# Altium PCB PCB2.PcbDoc
Units mil, origin at the board's own origin, x right, y up, seen from the top; angles counter-clockwise.
Board outline 4795.03 x 3920.03 mil, 2 copper layers (Top Layer, Bottom Layer); 16 components, 23 nets, 85 pads, 0 vias.
Unrouted connection lines stored in the file: 3.
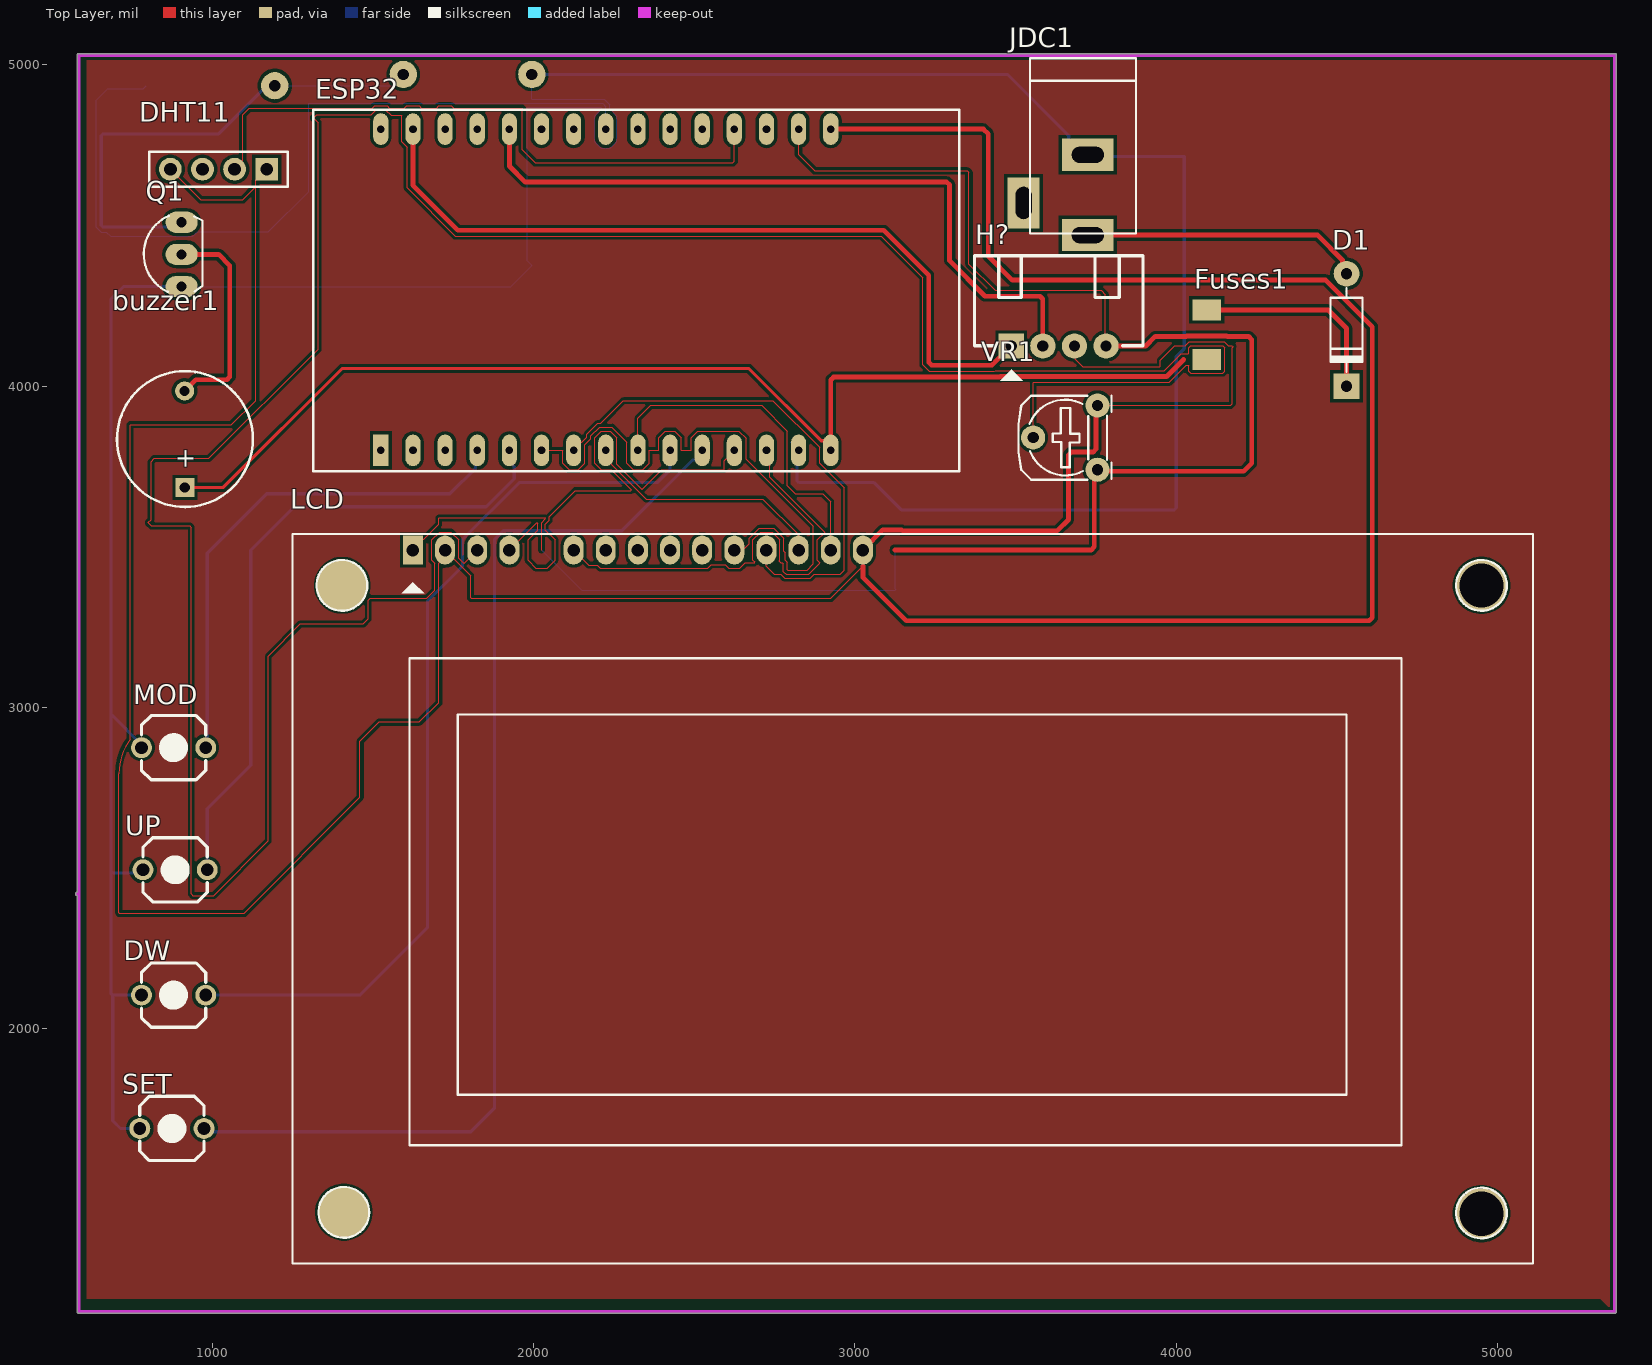
[diagram p0: Top Layer view]
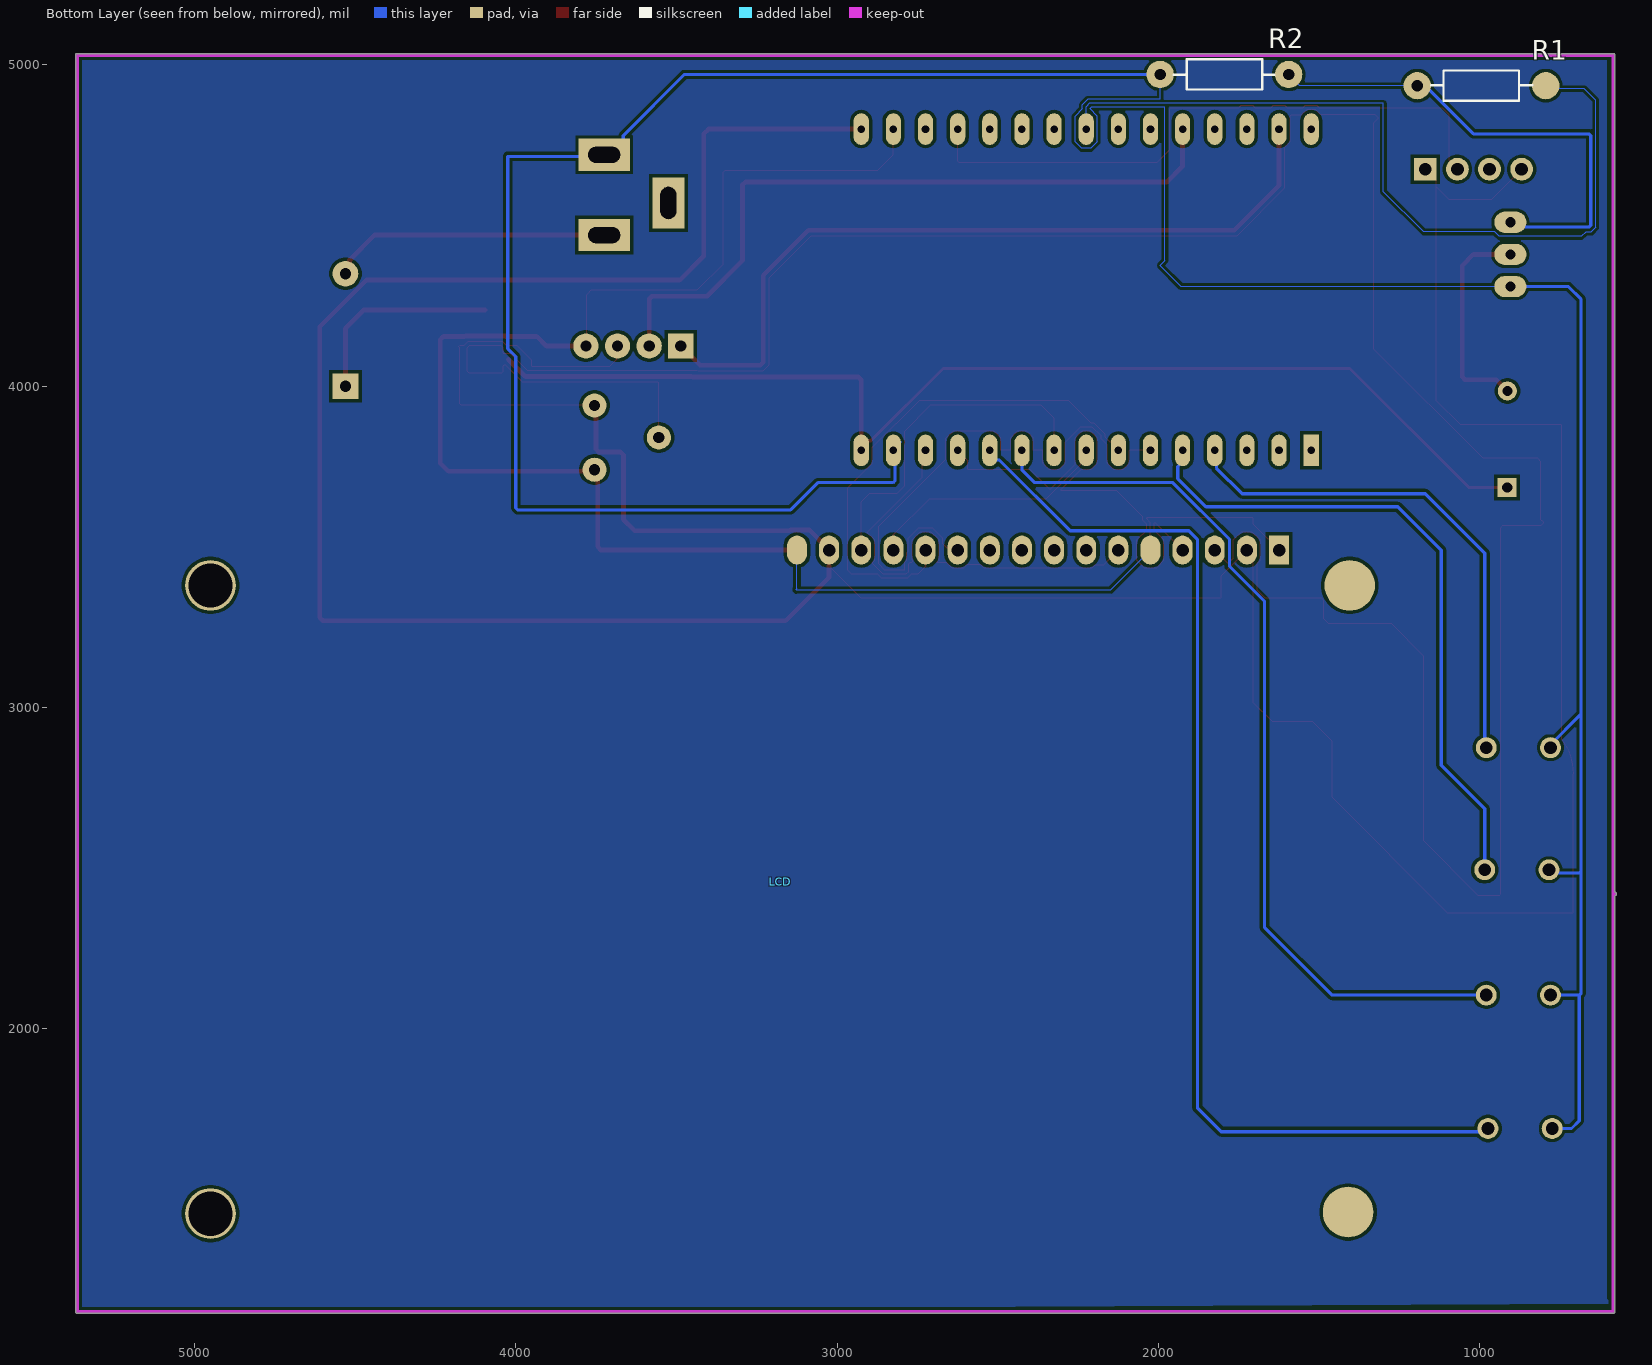
[diagram p1: Bottom Layer view, seen from below]
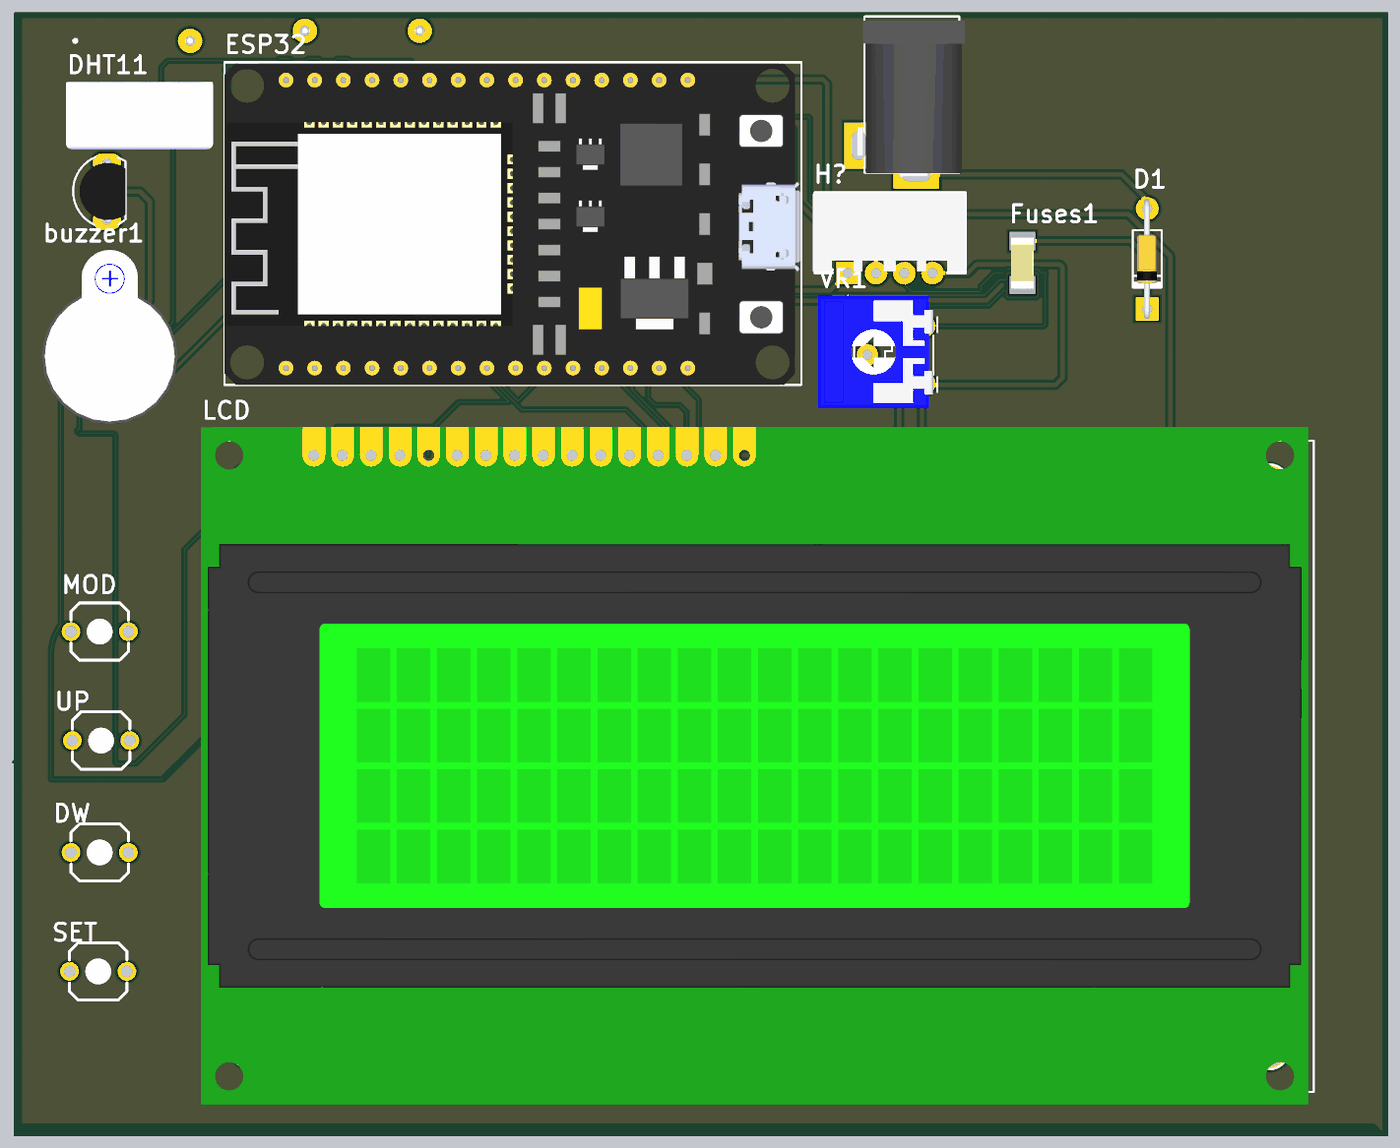
[diagram p2: 3D render of the assembled board from above, using the file's embedded part models]

## Layer stack, top to bottom
Top Solder: solder mask 0.4, Solder Resist, Dk 3.5
Top Layer: signal copper 1.4
Dielectric 1: dielectric 12.6, FR-4, Dk 4.8
Bottom Layer: signal copper 1.4
Bottom Solder: solder mask 0.4, Solder Resist, Dk 3.5

## Board outline
579.99,1120 579.99,2414.99 cw(c580,2420) 579.99,2425.01 579.99,5030 cw(c585,5030) 585,5035.02 5365,5035.02 cw(c5365,5030) 5370.02,5030 5370.02,1120 cw(c5365,1120) 5365,1114.98 585,1114.98 cw(c585,1120)

## Design rules (kind name [scope] priority, off if disabled: settings)
Clearance [All] p1: gap=10 ignorepadtopadclearanceinfootprint=FALSE except(0: Arc-Hole Track-Hole SMDPad-Hole THPad-Hole Via-Hole Fill-Hole Poly-Hole Region-Hole Text-Hole)
PolygonConnect [All] p1: connectstyle=Relief reliefconductorwidth=10 reliefentries=4 polygonreliefangle="90 Angle" airgapwidth=10
RoutingVias [All] p1: holewidth=28 width=50 viastyle="Through Hole" minholewidth=28 minwidth=50 maxholewidth=28 maxwidth=50
SilkToSilkClearance [IsText] p1: silktosilkclearance=10
SolderMaskExpansion [All] p1: expansion=4 istentingtop=FALSE
Width [All] p1: maxlimit=50 minlimit=2 preferedwidth=10
29 further rules are at their usual default settings.

## Classes and differential pairs
component class Sheet1: D1 DHT11 DW Fuses1 JDC1 LCD MOD Q1 R1 R2 SET UP VR1

## Components (designator, comment, footprint, x,y, rotation, side; value= is the part's Value field where it differs from the comment)
buzzer1 "TMB12A05" Speaker 915,3685 r90 top
D1 "1N4007" D1A 4530,4350 r90 top
DHT11 "DHT11" DHT11 1020,4675 r180 top
DW "Nut Nhan 2 Chan SMD 3x6x2.5" "Button 2 Pin" 880,2105 r180 top
ESP32 "ESP32 DEVKIT" "ESP32 WROOM 32 KIT" 1525,3800 r90 top
Fuses1 "0.5A 125V" "Cau Chi SMD1808" 4095,4160 r270 top
H? "Header 4P 2.54 Duc Cong" "Header 4P DC 2.54" 3487.57,4126 r90 top
JDC1 "Jac DC" DC-IN 3625,4595 r270 top
LCD "LCD 2004" "LCD 2004" 1625,3490 r0 top
MOD "Nut Nhan 2 Chan SMD 3x6x2.5" "Button 2 Pin" 880,2875 r180 top
Q1 "C1815" TO92 905,4410 r90 top value=C9014
R1 "1k" RES-1/4W#1 1010,4940 r0 bottom
R2 "10k" RES-1/4W#2 1780,4965 r180 bottom
SET "Nut Nhan 2 Chan SMD 3x6x2.5" "Button 2 Pin" 875,1690 r180 top
UP "Nut Nhan 2 Chan SMD 3x6x2.5" "Button 2 Pin" 885,2495 r180 top
VR1 "10K" VR-S2 3755,3740 r90 top value="Volume 50k"

## Footprints (in the part's own frame and the unit in brackets; to place one, negate y for a bottom-side part, rotate by r counter-clockwise, add the part's x,y. Pads: shape width x height; smd on the part's side, far side on the other; paste and mask are expansions set on the pad)
"Button 2 Pin" [mil] "Button 200mil 2 Pin"
  round 65 hole 40: 1(-100,0) 2(100,0)
  silkscreen extent -100,-100 100,100
"Cau Chi SMD1808" [mil]
  rect 64x90 smd: 1(-77,0) 2(77,0)
  body extent -91,-39 91,39, height 39
D1A [mil] "Diode 1A, W 100mil, L 350mil"
  round 80 hole 35: 1(0,0)
  rect 80x80 hole 35: 2(-350,0)
  silkscreen extent -305,-50 -45,50, body extent -386,-33 34,36, height 84
DC-IN [mil] "Jac DC input"
  rect 100x160 hole 50 slot 100 at 90 deg: 1(125,100) 2(-125,100)
  rect 160x100 hole 50 slot 100 at 0 deg: 3(25,-100)
  silkscreen extent -425,-80 120,250, body extent -410,-105 134,269, height 434
DHT11 [mm]
  rect 1.8x1.8 hole 1.02: 1(-3.81,0)
  round 1.8 hole 1.02: 2(-1.27,0) 3(1.27,0) 4(3.81,0)
  silkscreen extent -5.46,-1.4 5.46,1.4, body extent -6.48,-3 6.52,3, height 26
"ESP32 WROOM 32 KIT" [mm]
  rect 2.5x1.2 hole 0.6: 1(0,0)
  oval 2.5x1.2 hole 0.6: 2(0,-2.54) 3(0,-5.08) 4(0,-7.62) 5(0,-10.16) 6(0,-12.7) 7(0,-15.24) 8(0,-17.78) 9(0,-20.32) 10(0,-22.86) 11(0,-25.4) 12(0,-27.94) 13(0,-30.48) 14(0,-33.02) 15(0,-35.56) 16(25.4,-35.56) 17(25.4,-33.02) 18(25.4,-30.48) 19(25.4,-27.94) 20(25.4,-25.4) 21(25.4,-22.86) 22(25.4,-20.32) 23(25.4,-17.78) 24(25.4,-15.24) 25(25.4,-12.7) 26(25.4,-10.16) 27(25.4,-7.62) 28(25.4,-5.08) 29(25.4,-2.54) 30(25.4,0)
  silkscreen extent -1.65,-45.72 26.92,5.33, body extent -1.65,-45.6 26.85,5.33, height 10.49
"Header 4P DC 2.54" [mil]
  rect 78.74x78.74 hole 35: 1(-1,1)
  round 78.74 hole 35: 2(-1,-97.43) 3(-1,-195.85) 4(-1,-294.28)
  silkscreen extent -110,-409 280,115, body extent 5,-413 278,123, height 290
"LCD 2004" [mil] "LCD dipslay 20x4, 16 pin"
  rect 62x90 hole 39: 1(0,0)
  oval 62x90 hole 39: 2(100,0) 3(200,0) 4(300,0) 6(500,0) 7(600,0) 8(700,0) 9(800,0) 10(900,0) 11(1000,0) 12(1100,0) 13(1200,0) 14(1300,0) 15(1400,0)
  oval 62x90 smd far side: 5(400,0) 16(1500,0)
  round 157.48 all layers, no hole: "Hole 0"(-220,-110) "Hole 3"(-215,-2060)
  round 157.48 hole 137.8: "Hole 0"(3325,-2065) "Hole 0"(3325,-110)
  silkscreen extent -375,-2220 3485,50, body extent -392,-2264 3466,98, height 417
RES-1/4W#1 [mil]
  round 85 smd: 1(-215,5)
  round 85 hole 35: 2(185,5)
  silkscreen extent -173,-42 141,52, body extent -227,-42 197,52, height 95
RES-1/4W#2 [mil]
  round 85 hole 35: 1(-215,5) 2(185,5)
  silkscreen extent -173,-42 141,52, body extent -227,-42 197,52, height 95
Speaker [mm]
  rect 1.5x1.5 hole 0.8: 1(0,0)
  round 1.5 hole 0.8: 2(7.62,0.013)
  silkscreen extent -1.55,-5.38 9.18,5.36, body extent -2.22,-6 13.24,6, height 4.5
TO92 [mil] "TO-92"
  oval 66x100 hole 32: 1(-100,0) 2(0,0) 3(100,0)
  silkscreen extent -117,-65 120,118, body extent -109,-66 109,95, height 245
VR-S2 [mil] "Resistor Variable"
  round 75 hole 35: 1(0,0) 2(100,200) 3(200,0)
  silkscreen extent -31,-44 231,246, body extent -87,-30 307,372, height 165

## Part data
buzzer1: library part Buzz, "Buzzer >= 80dB, 5V"
D1: library part D1A, "Diode 1A"
DHT11: Manufacturer="W¨¹rth Elektronik eiSos GmbH", partNo=613004143121, ComponentLink1 Description=Manufacturer, ComponentLink1URL=http://www.we-online.com, ComponentLink2 Description=Datasheet, ComponentLink2URL=http://katalog.we-online.de/em/datasheet/6130xx143121.pdf, Created by="Karrer Zheng", Created Date="29 March 2013", NoPins=04
ESP32: library part "ESP32 WROOM 32 KIT"
Fuses1: library part "Cau chi 0.5A 125V SMD1808", "Cau chi 0.5A 125V SMD1808", Ma_Hang=MH009241, Ten="Cầu Chì 0.5A 125V SMD1808 0451.500MRL"
H?: "Cắm", Chung_Loai=Cắm, Don_Vi=Con, Ma_Hang=MH001310, Ten_Linh_Kien="Header 4P XH2.54-4P Đực Cong"
JDC1: library part DCIN, "Jac DC input"
LCD: library part "LCD 2004 5V", "LCD 2004 5V Xanh Dương", CHIP=HD44780, Don Vi Mua=Nshop, Ma_Hang=WVEZ, Ten="LCD 2004 Xanh Dương"
Q1: library part "Trans C1815 DIP", "NPN transistor"
R1: library part "Tro 0603 1% 1k", "Dán", Chung_Loai=Dán, Don_Vi=Con, Ma_Hang=MH006334, So_Chan=2, Ten_Linh_Kien="Trở 0603 1% 1k"
R2: library part "Tro 0603 5% 10k", "Dán", Chung_Loai=Dán, Don_Vi=Con, Ma_Hang=MH006316, So_Chan=2, Ten_Linh_Kien="Trở 0603 5% 10k"
VR1: library part VR-S, "Var Resistor"
DW MOD SET UP: Ma_Hang=MH001036, Ten="Nút Nhấn 2 Chân 3x6x2.5MM SMD"

## Nets (pads, with @x,y where several pads share a name; then routed paths per layer and width w, separated by ;. In a path a pad name is that pad's centre, name@x,y a point inside that pad or via, vN(x,y) a via of type N, cw(c..) or ccw(c..) an arc to the next point about the centre after c; other vN are vias at no path point)
button1: ESP32.4 MOD.1 | length 1601.8
  Bottom Layer w10: MOD.1@985,2880 985,3480 1170,3665 1740,3665 1819.89,3744.89 1819.89,3794.89 ESP32.4
button2: ESP32.5 UP.1 | length 2056.9
  Bottom Layer w10: UP.1 985,2685 1120,2820 1120,3490 1255,3625 1852.66,3625 1940,3712.34 1940,3749.93 1925,3764.93 ESP32.5
button3: DW.1 ESP32.10 | length 2826
  Bottom Layer w10: DW.1 1460,2105 1670,2315 1670,3330 1779,3439 1779,3523.05 1955.95,3700 2385,3700 2425,3740 ESP32.10
button4: ESP32.11 SET.1 | length 3476.1
  Bottom Layer w10: SET.1 985,1680 1805,1680 1879,1754 1879,3523.05 1905.95,3550 2275,3550 2494.89,3769.89 2507.8,3769.89 2525,3787.1 ESP32.11
Buzzer: ESP32.23 R1.1 | length 2573.5
  Bottom Layer w2: R1.1 785,4925 675,4925 639,4889 639,4494.23 654.23,4479 671,4479 684,4466 940.23,4466 954.23,4480 1175,4480 1300,4605 1300,4878.83 1301.17,4880 2215,4880 2225,4870 ESP32.23
D4: ESP32.6 LCD.11 | length 1946.8
  Top Layer w2: ESP32.6 2089.21,3800 2090.38,3798.83 2090.38,3760.07 2110.66,3739.79 2139.34,3739.79 2159.62,3760.07 2159.62,3817.65 2178.38,3836.41 2178.38,3844.9 2205.69,3872.21 2244.31,3872.21 2290.38,3826.15 2290.38,3760.07 2310.66,3739.79 2339.34,3739.79 2359.62,3760.07 2359.62,3798.83 2360.79,3800 2389.21,3800 2390.38,3801.17 2390.38,3839.93 2410.66,3860.21 2439.34,3860.21 2459.62,3839.93 2459.62,3801.17 2460.79,3800 2489.21,3800 2490.38,3801.17 2490.38,3839.93 2510.66,3860.21 2639.34,3860.21 2662.45,3837.1 2662.45,3772.55 2871,3564 2871,3446.6 2851.4,3427 2791.17,3427 2790,3428.17 2790,3451.6 2783,3458.6 2783,3482 2779,3486 2779,3526.37 2747.37,3558 2702.63,3558 2671,3526.37 2671,3509.4 2657.83,3496.23 2631.23,3496.23 LCD.11
D5: ESP32.7 LCD.12 | length 1628.8
  Top Layer w2: ESP32.7 2125,3804.55 2145.9,3825.45 2150.45,3825.45 2166.38,3841.38 2166.38,3849.87 2200.72,3884.21 2209.21,3884.21 2280,3955 2744.55,3955 2890.38,3809.18 2890.38,3760.07 2967,3683.45 2967,3427 2955,3415 2873.34,3415 2861.34,3403 2781.23,3403 2769.23,3415 2750,3415 2725,3440 LCD.12
D6: ESP32.8 LCD.13 | length 771.5
  Top Layer w2: ESP32.8 2225,3774.41 2350.59,3648.82 2714.18,3648.82 2825,3538 LCD.13
D7: ESP32.9 LCD.14 | length 1090.4
  Top Layer w2: ESP32.9 2325,3900 2365,3940 2710,3940 2790,3860 2790,3690 2815,3665 2900,3665 2925,3640 LCD.14
EN: ESP32.13 LCD.6 | length 1456.2
  Top Layer w2: LCD.6 2171.7,3443.3 2198.3,3443.3 2207.6,3434 2542.4,3434 2553.4,3445 2596.6,3445 2607.6,3434 2642.4,3434 2658.4,3450 2687.6,3450 2688.77,3451.17 2688.77,3452.83 2683,3458.6 2683,3521.4 2707.6,3546 2742.4,3546 2767,3521.4 2767,3458.6 2764.86,3456.46 2764.86,3454.8 2768.94,3450.72 2773.91,3450.72 2778,3446.63 2778,3423.2 2786.2,3415 2856.37,3415 2890.66,3449.29 2890.66,3450.95 2883,3458.6 2883,3521.4 2905.96,3544.36 2905.96,3546.01 2735,3716.97 2735,3752.17 2725,3762.17 ESP32.13
GND: DW.2 ESP32.14 JDC1.2 MOD.2 Q1.1 R2.1 SET.2 UP.2 | length 10329.8
  Bottom Layer w2: Q1.1 1930,4310 1994.17,4374.17 1994.17,4375.83 1980,4390 1980,4866.83 1981.17,4868 2210.03,4868 2213,4865.03 2213,4862.55 2190.38,4839.93 2190.38,4760.07 2210.66,4739.79 2239.34,4739.79 2259.62,4760.07 2259.62,4839.93 2237,4862.55 2237,4874.97 2219.97,4892 1996.17,4892 1995,4893.17 R2.1 ; 2799.55,3825.45 2804.1,3825.45 2825,3804.55 ESP32.14
  Bottom Layer w10: SET.2 715,1690 690.86,1714.14 690.86,2105 ; DW.2 690.86,2105 ; UP.2 775,2485 690.86,2485 685,2490.86 ; MOD.2@785,2880 685,2980 ; Q1.1 725,4310 685,4270 685,2980 ; R2.1 3475,4970 3665.86,4779.14 3665.86,4765 3710.86,4720 JDC1.2 3730,4715 4025,4715 4025,4116.82 4000.5,4092.32 4000.5,3620.86 3994.64,3615 3145,3615 3060,3700 2825.86,3700 2820,3705.86 2820,3795 ESP32.14 ; 685,2490.86 685,2110.86 690.86,2105 ; 685,2490.86 685,2980
Netbuzzer1_2: buzzer1.2 Q1.2 | length 669.3
  Top Layer w15: Q1.2 1020,4410 1055,4375 1055,4028.79 1046.21,4020 949.5,4020 buzzer1.2
NetD1_1: D1.1 JDC1.1 | length 872.3
  Top Layer w15: JDC1.1 4440,4470 4517.56,4392.44 4517.56,4362.44 D1.1
NetD1_2: D1.2 Fuses1.1 | length 638.6
  Top Layer w15: Fuses1.1 4473,4237 4530,4180 D1.2
NetDHT11_1: DHT11.1 DHT11.4 ESP32.16 H?.3 LCD.2 LCD.15 VR1.3 | length 13403.4
  Top Layer w2: DHT11.4 965,4580 1095,4580 1135,4620 ; DHT11.1 1135,4640 1135,4620 ; LCD.15 3025,3440 2925,3340 1806.17,3340 1805,3341.17 1805,3410 LCD.2 1725,3469.57 1705,3449.57 1705,3015 1645,2955 1520,2955 1460,2895 1460,2720 1100,2360 711.17,2360 710,2361.17 710,2794.47 cw(c889.12,2794.47) 745,2900.83 745,3878.83 746.17,3880 1060,3880 1135,3955 1135,4620 ; H?.3 3686.2,4122.23 3686.2,4083.8 3709.5,4060.5 3948.83,4060.5 3950,4061.67 3950,4080 3995,4125 4027.47,4125 4040.47,4138 4149.53,4138 4161.53,4126 4175,4126 4177.17,4123.83 4177.17,4122.17 4175,4120 4175,3945 4170,3940 VR1.3
  Top Layer w15: ESP32.16 3400,4800 3415,4785 3415,4405 3490,4330 4465,4330 4610,4185 4610,3280 4600,3270 3160,3270 3025,3405 3025,3440 ; LCD.15 3025,3491.28 3053.55,3519.83 3054.83,3519.83 3087.5,3552.5 3145.09,3552.5 3147.59,3550 3630,3550 3665,3585 3665,3786.21 3673.79,3795 3741.21,3795 3750,3803.79 3750,3935 VR1.3
NetDHT11_2: DHT11.2 ESP32.19 | length 1984.5
  Top Layer w2: DHT11.2 1070,4677.7 1095,4702.7 1095,4845 1115,4865 1498.48,4865 1505.69,4872.21 1544.31,4872.21 1551.52,4865 1598.48,4865 1605.69,4872.21 1644.31,4872.21 1651.52,4865 1698.48,4865 1705.69,4872.21 1744.31,4872.21 1751.52,4865 1963.83,4865 1965,4863.83 1965,4735 2005,4695 2620,4695 2625,4700 ESP32.19
NetESP32_17: ESP32.17 H?.4 LCD.1 LCD.5 LCD.16 VR1.1 | length 5609.4
  Top Layer w2: LCD.1 1625,3492.83 1655,3522.83 1657.83,3522.83 1705,3570 1705,3588.83 1706.17,3590 2036,3590 2037.17,3588.83 2037.17,3587.17 2025,3575 2025,3490 ; ESP32.17 2825,4720 2875,4670 3350,4670 3355,4665 3355,4380 3436.5,4298.5 3766.5,4298.5 3780,4285 3780,4126.85 H?.4
  Top Layer w15: 3125,3490 3735,3490 3745,3500 3745,3730 VR1.1 3760,3735 4210,3735 4235,3760 4235,4145 4225,4155 4158.69,4155 4157.19,4156.5 4032.81,4156.5 4031.31,4155 3935,4155 3905,4125 H?.4
  Bottom Layer w2: LCD.5 2150,3365 3126,3365 3127.17,3366.17 3127.17,3367.83 3125,3370 LCD.16
NetLCD_3: LCD.3 VR1.2 | length 9186.4
  Top Layer w2: LCD.3 1784.31,3449.31 1782.66,3449.31 1767,3464.97 1767,3521.4 1742.4,3546 1707.6,3546 1683,3521.4 1683,3458.6 1693,3448.6 1693,3365 1668,3340 1491.91,3340 1485.96,3334.04 1485.96,3275.96 1470,3260 1275,3260 1175,3160 1175,2585 1005,2415 940,2415 935,2420 935,3560 930,3565 810,3565 800.83,3574.17 800.83,3575.83 810,3585 810,3765 820,3775 990,3775 1330,4115 1330,4820 1315.83,4834.17 1315.83,4835.83 1325,4845 1495.45,4845 1510.66,4860.21 1539.34,4860.21 1557.28,4842.28 1589.21,4842.28 1590.38,4841.11 1590.38,4760.07 1606.5,4743.95 1606.5,4617.34 1757.34,4466.5 3082.34,4466.5 3211.5,4337.34 3211.5,4066.12 3231.12,4046.5 3434.24,4046.5 3436.24,4048.5 3962.34,4048.5 4015.34,4101.5 4037.83,4101.5 4039,4102.67 4039,4119.56 4045.44,4126 4144.56,4126 4151,4119.56 4151,4046.44 4144.56,4040 4045.44,4040 4039,4046.44 4039,4063.33 4037.83,4064.5 4030.66,4064.5 3977.66,4011.5 3556.17,4011.5 3555,4010.33 VR1.2
NetQ1_3: Q1.3 R1.2 R2.2 | length 1587.2
  Top Layer w15: Q1.3@895.24,4500.24 Q1.3
  Bottom Layer w2: R1.2 1560,4935 R2.2
  Bottom Layer w10: Q1.3 872.85,4510 857.85,4495 660.86,4495 655,4500.86 655,4779.14 660.86,4785 1020,4785 R1.2@1200,4965
RS: ESP32.12 LCD.4 | length 1663.6
  Top Layer w2: LCD.4 2010.17,3575.17 2011.83,3575.17 2013,3574 2013,3551.4 1983,3521.4 1983,3458.6 2007.6,3434 2042.4,3434 2067,3458.6 2067,3521.4 2037,3551.4 2037,3570.03 2049.17,3582.2 2049.17,3593.8 2130.37,3675 2303.44,3675 2304.61,3676.17 2304.61,3677.83 2242.65,3739.79 2210.66,3739.79 2190.38,3760.07 2190.38,3839.93 2210.66,3860.21 2239.34,3860.21 2259.62,3839.93 2259.62,3756.76 2337.36,3679.02 2339.02,3679.02 2399.79,3739.79 2592.09,3739.79 2593.48,3741.17 2593.48,3768.48 2599.55,3774.55 2604.1,3774.55 2625,3795.45 ESP32.12
SCL: ESP32.29 H?.1 | length 2452.3
  Top Layer w15: ESP32.29 1625,4625 1765,4485 3090,4485 3230,4345 3230,4073.79 3238.79,4065 3426.57,4065 H?.1
SDA: ESP32.26 H?.2 | length 2231
  Top Layer w15: ESP32.26 1925,4685 1975,4635 3286.21,4635 3295,4626.21 3295,4390 3405,4280 3576.21,4280 3585,4271.21 H?.2
Vin: buzzer1.1 ESP32.15 Fuses1.2 | length 3607.2
  Top Layer w10: buzzer1.1 1035,3685 1405,4055 2670,4055 2894.89,3830.11 2907.8,3830.11 2925,3812.9 ESP32.15
  Top Layer w15: ESP32.15@2925,3812.9 2925,4019.21 2933.79,4028 3450.89,4028 3452.89,4030 3970,4030 4023,4083
pads on no net: "LCD.Hole 0" "LCD.Hole 3" DHT11.3 ESP32.1 ESP32.2 ESP32.3 ESP32.18 ESP32.20 ESP32.21 ESP32.22 ESP32.24 ESP32.25 ESP32.27 ESP32.28 ESP32.30 JDC1.3 LCD.7 LCD.8 LCD.9 LCD.10

## Polygon pours and split planes (outlines as drawn)
no net on Bottom Layer "NONET_L02_P003" (solid, pour order 3): 590,1145 605,1160 605,5035 5375,5035 5380,5030 5370,5020 5370,1120
no net on Top Layer "NONET_L01_P004" (solid, pour order 4): 610,5025 610,1160 5320,1160 5365,1115 5375,1125 5375,5015

## Keep-outs
Keep-Out Layer:
  lines w10: 580,2420 585,2420 585,5030 5365,5030 5365,1120 585,1120 585,2435

## Text inside footprints (layer, text, board x,y; h text height)
buzzer1: Top Overlay "+" at 943,3740.5 h60 r90